# EAGLE board xiao-extension-grid (EAGLE 9.6.2)
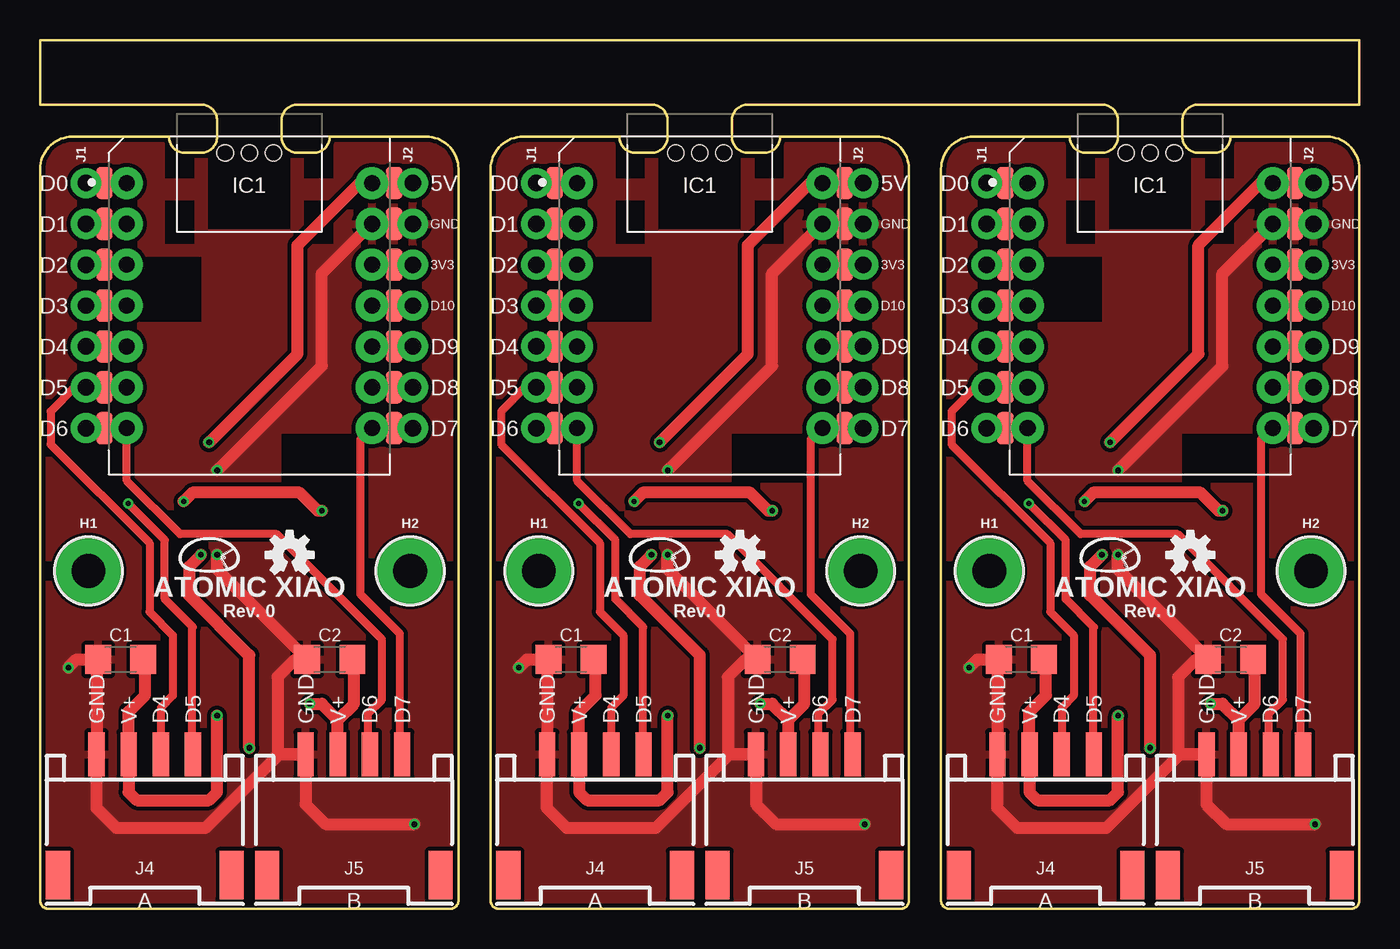
[diagram p0: board, top side]
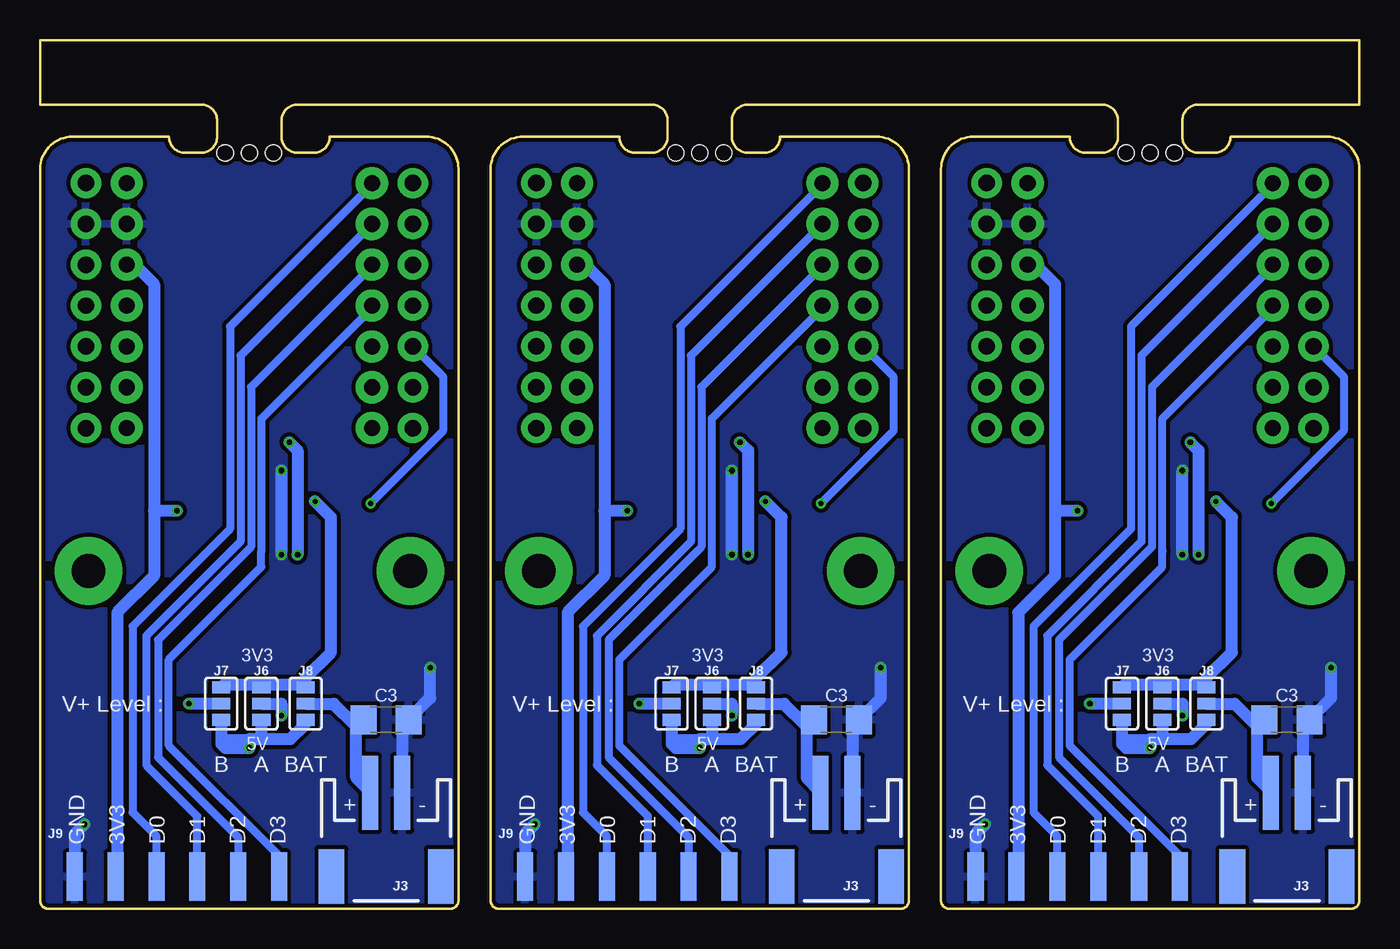
[diagram p1: board, bottom side, seen from below]

Size 82 x 54 mm. Coordinates in mm from the lower left corner, seen from the top.
Outline: 26,0.5 26,46 arc90 24,48 18,48 arc-90 17,47 16,47 arc-90 15,48 15,49 arc-90 16,50 28,50 38,50 arc-90 39,49 39,48 arc-90 38,47 37,47 arc-90 36,48 30,48 arc90 28,46 28,0.5 arc90 28.5,0 53.5,0 arc90 54,0.5 54,46 arc90 52,48 46,48 arc-90 45,47 44,47 arc-90 43,48 43,49 arc-90 44,50 56,50 66,50 arc-90 67,49 67,48 arc-90 66,47 65,47 arc-90 64,48 58,48 arc90 56,46 56,0.5 arc90 56.5,0 81.5,0 arc90 82,0.5 82,46 arc90 80,48 74,48 arc-90 73,47 72,47 arc-90 71,48 71,49 arc-90 72,50 82,50 82,54 56,54 28,54 0,54 0,50 10,50 arc-90 11,49 11,48 arc-90 10,47 9,47 arc-90 8,48 2,48 arc90 0,46 0,0.5 arc90 0.5,0 25.5,0 arc90 26,0.5
Copper layers (1*16): Top 0.035mm / dielectric 1.5mm / Bottom 0.035mm
Design rules "ssci_SeeedStudio_2layer_DRU_no_angle *": minimum track width 0.5mm, minimum drill 12mil, track to track 6mil, track to pad 6mil, pad to pad 6mil, via to via 6mil, smd to smd 0mil, copper to edge 10mil, drill to drill 10mil, minimum pad ring 10mil, minimum via ring 6mil, stop-mask expansion 2mil, vias tented up to drill 25mil, thermal gap 10mil
Net classes: 0 default: width 0.5 mm; 1 pwr: width 0.75 mm, clearance 0.25 mm
Holes 1 mm at 11.5,47 13,47 14.5,47 39.5,47 41,47 42.5,47 67.5,47 69,47 70.5,47

## Footprints (pad centres in the part's own frame; a part is rotated, then mirrored left to right if it is on the bottom)
C3216 = smd 1.6 x 1.8: 1 -1.4,0; 2 1.4,0
MOUNTING_HOLE_2.1 = drill 2.1 pad 4.2: H$1 0,0
XIAO-NRF52840-DIP = drill 1 pad 2: 3V3 7.62,-7.96; 5V 7.62,-2.88; D0 -7.62,-2.88; D1 -7.62,-5.42; D2 -7.62,-7.96; D3 -7.62,-10.5; D4 -7.62,-13.04; D5 -7.62,-15.58; D6 -7.62,-18.12; D7 7.62,-18.12; D8 7.62,-15.58; D9 7.62,-13.04; D10 7.62,-10.5; GND 7.62,-5.42
XIAO-NRF52840-SMD-PROTO = smd 1 x 2: 3V3 9,-7.96; 5V 9,-2.88; D0 -9,-2.88; D1 -9,-5.42; D2 -9,-7.96; D3 -9,-10.5; D4 -9,-13.04; D5 -9,-15.58; D6 -9,-18.12; D7 9,-18.12; D8 9,-15.58; D9 9,-13.04; D10 9,-10.5; GND 9,-5.42
1X07_NO_SILK = drill 1.016 pad 1.88: 1 0,0; 2 2.54,0; 3 5.08,0; 4 7.62,0; 5 10.16,0; 6 12.7,0; 7 15.24,0
JST-2-SMD = smd 1 x 4.6: 1 -1,-3.7; 2 1,-3.7 | smd 1.6 x 3.4: NC1 -3.4,1.5; NC2 3.4,1.5
HW4-SMD-2.0-90D = smd 1.01 x 2.74: 0 -1,-0.1; 1 -3,-0.1; GND 3,-0.1; V+ 1,-0.1 | smd 1.5 x 3: SS1 -5.4,7.4; SS2 5.4,7.4
SMT-JUMPER_3_1-NC_PASTE_SILK = smd 0.75 x 1.2: 1 -1,0; 2 0,0; 3 1,0
1X06-SMD_RA_MALE = smd 1 x 3: 1 -6.35,5; 2 -3.81,5; 3 -1.27,5; 4 1.27,5; 5 3.81,5; 6 6.35,5

## Placement (x,y rotation side)
C1  100u  [C3216]  5,15.5 180 top
C2  100u  [C3216]  18,15.5 180 top
C3  100u  [C3216]  4.5,11.75 0 bottom
C4  100u  [C3216]  33,15.5 180 top
C5  100u  [C3216]  46,15.5 180 top
C6  100u  [C3216]  32.5,11.75 0 bottom
C7  100u  [C3216]  61,15.5 180 top
C8  100u  [C3216]  74,15.5 180 top
C9  100u  [C3216]  60.5,11.75 0 bottom
H1  HOLE-2.1  [MOUNTING_HOLE_2.1]  3,21 0 top
H2  HOLE-2.1  [MOUNTING_HOLE_2.1]  23,21 0 top
H3  HOLE-2.1  [MOUNTING_HOLE_2.1]  31,21 0 top
H4  HOLE-2.1  [MOUNTING_HOLE_2.1]  51,21 0 top
H5  HOLE-2.1  [MOUNTING_HOLE_2.1]  59,21 0 top
H6  HOLE-2.1  [MOUNTING_HOLE_2.1]  79,21 0 top
IC1  SEEED-STUDIO-XIAO-NRF52840-DIP  [XIAO-NRF52840-DIP]  13,48 0 top
IC2  SEEED-STUDIO-XIAO-NRF52840-PROTO  [XIAO-NRF52840-SMD-PROTO]  13,48 0 top
IC3  SEEED-STUDIO-XIAO-NRF52840-DIP  [XIAO-NRF52840-DIP]  41,48 0 top
IC4  SEEED-STUDIO-XIAO-NRF52840-PROTO  [XIAO-NRF52840-SMD-PROTO]  41,48 0 top
IC5  SEEED-STUDIO-XIAO-NRF52840-DIP  [XIAO-NRF52840-DIP]  69,48 0 top
IC6  SEEED-STUDIO-XIAO-NRF52840-PROTO  [XIAO-NRF52840-SMD-PROTO]  69,48 0 top
J1  [1X07_NO_SILK]  2.84,45.12 270 top
J2  [1X07_NO_SILK]  23.16,45.12 270 top
J3  [JST-2-SMD]  4.5,3.5 180 bottom
J4  GROVE-CONNECTOR-SMD90D  [HW4-SMD-2.0-90D]  6.5,9.5 180 top
J5  GROVE-CONNECTOR-SMD90D  [HW4-SMD-2.0-90D]  19.5,9.5 180 top
J6  JUMPER-SMT_3_1-NC_PASTE-SILK  [SMT-JUMPER_3_1-NC_PASTE_SILK]  12.25,12.75 90 bottom
J7  JUMPER-SMT_3_1-NC_PASTE-SILK  [SMT-JUMPER_3_1-NC_PASTE_SILK]  14.75,12.75 90 bottom
J8  JUMPER-SMT_3_1-NC_PASTE-SILK  [SMT-JUMPER_3_1-NC_PASTE_SILK]  9.5,12.75 90 bottom
J9  RA 6Pin SMD  [1X06-SMD_RA_MALE]  17.5,-3 0 bottom
J10  [1X07_NO_SILK]  30.84,45.12 270 top
J11  [1X07_NO_SILK]  51.16,45.12 270 top
J12  [JST-2-SMD]  32.5,3.5 180 bottom
J13  JUMPER-SMT_3_1-NC_PASTE-SILK  [SMT-JUMPER_3_1-NC_PASTE_SILK]  40.25,12.75 90 bottom
J14  JUMPER-SMT_3_1-NC_PASTE-SILK  [SMT-JUMPER_3_1-NC_PASTE_SILK]  42.75,12.75 90 bottom
J15  GROVE-CONNECTOR-SMD90D  [HW4-SMD-2.0-90D]  47.5,9.5 180 top
J16  GROVE-CONNECTOR-SMD90D  [HW4-SMD-2.0-90D]  34.5,9.5 180 top
J17  JUMPER-SMT_3_1-NC_PASTE-SILK  [SMT-JUMPER_3_1-NC_PASTE_SILK]  37.5,12.75 90 bottom
J18  RA 6Pin SMD  [1X06-SMD_RA_MALE]  45.5,-3 0 bottom
J19  [1X07_NO_SILK]  58.84,45.12 270 top
J20  [1X07_NO_SILK]  79.16,45.12 270 top
J21  [JST-2-SMD]  60.5,3.5 180 bottom
J22  JUMPER-SMT_3_1-NC_PASTE-SILK  [SMT-JUMPER_3_1-NC_PASTE_SILK]  68.25,12.75 90 bottom
J23  JUMPER-SMT_3_1-NC_PASTE-SILK  [SMT-JUMPER_3_1-NC_PASTE_SILK]  70.75,12.75 90 bottom
J24  GROVE-CONNECTOR-SMD90D  [HW4-SMD-2.0-90D]  75.5,9.5 180 top
J25  GROVE-CONNECTOR-SMD90D  [HW4-SMD-2.0-90D]  62.5,9.5 180 top
J26  JUMPER-SMT_3_1-NC_PASTE-SILK  [SMT-JUMPER_3_1-NC_PASTE_SILK]  65.5,12.75 90 bottom
J27  RA 6Pin SMD  [1X06-SMD_RA_MALE]  73.5,-3 0 bottom
LOGO1  LOGO  [LOGO]  10.5,22 0 top
LOGO2  OSHW-LOGOS  [OSHW-LOGO-S]  15.5,22 0 top
LOGO3  LOGO  [LOGO]  38.5,22 0 top
LOGO4  OSHW-LOGOS  [OSHW-LOGO-S]  43.5,22 0 top
LOGO5  LOGO  [LOGO]  66.5,22 0 top
LOGO6  OSHW-LOGOS  [OSHW-LOGO-S]  71.5,22 0 top

## Library data of the parts
C1-C9 = rcl; SPICEPREFIX: C
H1-H6 = Botamochi-Hole
IC1-IC6 = Seeed Studio XIAO
J1 J2 J10 J11 J19 J20 = SparkFun-Connectors
J3 J12 J21 = SparkFun-Connectors; PROD_ID: CONN-11443
J4 J5 J15 J16 J24 J25 = SEEED-GROVE-CONNECTOR
J6-J8 J13 J14 J17 J22 J23 J26 = Botamochi-Jumper
J9 J18 J27 = ProtoBoard
LOGO1 LOGO3 LOGO5 = botamochi-symbol
LOGO2 LOGO4 LOGO6 = SparkFun-Aesthetics

## Nets
+3V1 [pwr]: IC3.3V3 IC4.3V3 J11.3 J13.3 J14.3 J17.3 J18.2
+3V2 [pwr]: IC5.3V3 IC6.3V3 J20.3 J22.3 J23.3 J26.3 J27.2
+3V3 [pwr]: IC1.3V3 IC2.3V3 J2.3 J6.3 J7.3 J8.3 J9.2
+5V [pwr]: IC1.5V IC2.5V J2.1 J6.1 J7.1 J8.1
+5V1 [pwr]: IC3.5V IC4.5V J11.1 J13.1 J14.1 J17.1
+5V2 [pwr]: IC5.5V IC6.5V J20.1 J22.1 J23.1 J26.1
D0: IC1.D0 IC2.D0 J1.1 J9.3
D1: IC1.D1 IC2.D1 J1.2 J9.4
D2: IC1.D2 IC2.D2 J1.3 J9.5
D3: IC1.D3 IC2.D3 J1.4 J9.6
D4: IC3.D0 IC4.D0 J10.1 J18.3
D5: IC3.D1 IC4.D1 J10.2 J18.4
D6: IC3.D2 IC4.D2 J10.3 J18.5
D7: IC3.D3 IC4.D3 J10.4 J18.6
D8: IC1.D9 IC2.D9 J2.5
D9: IC1.D8 IC2.D8 J2.6
D10: IC1.D10 IC2.D10 J2.4
D11: IC3.D10 IC4.D10 J11.4
D12: IC3.D9 IC4.D9 J11.5
D13: IC3.D8 IC4.D8 J11.6
D14: IC5.D0 IC6.D0 J19.1 J27.3
D15: IC5.D1 IC6.D1 J19.2 J27.4
D16: IC5.D2 IC6.D2 J19.3 J27.5
D17: IC5.D3 IC6.D3 J19.4 J27.6
D18: IC5.D10 IC6.D10 J20.4
D19: IC5.D9 IC6.D9 J20.5
D20: IC5.D8 IC6.D8 J20.6
GND [pwr]: C1.2 C2.2 C3.2 IC1.GND IC2.GND J2.2 J3.1 J4.GND J5.GND J9.1
GND1 [pwr]: C4.2 C5.2 C6.2 IC3.GND IC4.GND J11.2 J12.1 J15.GND J16.GND J18.1
GND2 [pwr]: C7.2 C8.2 C9.2 IC5.GND IC6.GND J20.2 J21.1 J24.GND J25.GND J27.1
N$1: C1.1 J4.V+ J6.2
N$2: C2.1 J5.V+ J7.2
N$3: C3.1 J3.2 J8.2
N$4: C4.1 J13.2 J16.V+
N$5: C5.1 J14.2 J15.V+
N$6: C6.1 J12.2 J17.2
N$7: C7.1 J22.2 J25.V+
N$8: C8.1 J23.2 J24.V+
N$9: C9.1 J21.2 J26.2
RX: IC1.D7 IC2.D7 J2.7 J5.1
RX1: IC3.D7 IC4.D7 J11.7 J15.1
RX2: IC5.D7 IC6.D7 J20.7 J24.1
SCL: IC1.D5 IC2.D5 J1.6 J4.0
SCL1: IC3.D5 IC4.D5 J10.6 J16.0
SCL2: IC5.D5 IC6.D5 J19.6 J25.0
SDA: IC1.D4 IC2.D4 J1.5 J4.1
SDA1: IC3.D4 IC4.D4 J10.5 J16.1
SDA2: IC5.D4 IC6.D4 J19.5 J25.1
TX: IC1.D6 IC2.D6 J1.7 J5.0
TX1: IC3.D6 IC4.D6 J10.7 J15.0
TX2: IC5.D6 IC6.D6 J19.7 J24.0

## Tracks (layer width: path | path; a pad name or v marks a point on that pad's centre or on a via)
+3V1  (via drill 0.3, 0.35)
  Top 0.75: J11.3 51,40.12 50.02,40.12 IC4.3V3 49.69,40.12 48.88,40.12 IC3.3V3 48.55,39.96 | v36.92,25.33 37.47,25.88 44.12,25.88 45.25,24.75 v45.5,24.75
  Bottom 0.75: J14.3 42.55,13.95 40.45,13.95 J13.3 40.05,13.95 37.7,13.95 J17.3 37.5,14.37 35.92,15.95 35.92,24.33 v36.92,25.33 | 46.92,24.75 46.92,38.83 48.13,40.04 IC3.3V3 | 46.92,24.75 46.92,20.7 49.2,18.42 49.2,2.12 J18.2 | 46.92,24.75 v45.5,24.75
+3V2  (via drill 0.3, 0.35)
  Top 0.75: J20.3 79,40.12 78.02,40.12 IC6.3V3 77.69,40.12 76.88,40.12 IC5.3V3 76.55,39.96 | v64.92,25.33 65.47,25.88 72.12,25.88 73.25,24.75 v73.5,24.75
  Bottom 0.75: J23.3 70.55,13.95 68.45,13.95 J22.3 68.05,13.95 65.7,13.95 J26.3 65.5,14.37 63.92,15.95 63.92,24.33 v64.92,25.33 | 74.92,24.75 74.92,38.83 76.13,40.04 IC5.3V3 | 74.92,24.75 74.92,20.7 77.2,18.42 77.2,2.12 J27.2 | 74.92,24.75 v73.5,24.75
+3V3  (via drill 0.3, 0.35)
  Top 0.75: J2.3 23,40.12 22.02,40.12 IC2.3V3 21.69,40.12 20.88,40.12 IC1.3V3 20.55,39.96 | v8.92,25.33 9.47,25.88 16.12,25.88 17.25,24.75 v17.5,24.75
  Bottom 0.75: J7.3 14.55,13.95 12.45,13.95 J6.3 12.05,13.95 9.7,13.95 J8.3 9.5,14.37 7.92,15.95 7.92,24.33 v8.92,25.33 | 18.92,24.75 18.92,38.83 20.13,40.04 IC1.3V3 | 18.92,24.75 18.92,20.7 21.2,18.42 21.2,2.12 J9.2 | 18.92,24.75 v17.5,24.75
+5V  (via drill 0.35)
  Top 0.75: J2.1 23,45.18 22.02,45.18 IC2.5V 21.69,45.18 20.71,45.18 IC1.5V 19.86,45.12 15.99,41.25 15.99,34.49 v10.5,29 | v13,10 13,15.75 9.25,19.5 9.25,21.25 v10,22
  Bottom 0.75: J6.1 12.25,10.55 | 12.25,10.55 13,10.55 13,10.5 14.75,10.5 J7.1 14.75,10.25 14.5,10 v13,10 | 12.25,10.55 10.45,10.55 9.5,11.5 J8.1 | v10.5,29 10,28.5 v10,22
+5V1  (via drill 0.35)
  Top 0.75: J11.1 51,45.18 50.02,45.18 IC4.5V 49.69,45.18 48.71,45.18 IC3.5V 47.86,45.12 43.99,41.25 43.99,34.49 v38.5,29 | v41,10 41,15.75 37.25,19.5 37.25,21.25 v38,22
  Bottom 0.75: J13.1 40.25,10.55 | 40.25,10.55 41,10.55 41,10.5 42.75,10.5 J14.1 42.75,10.25 42.5,10 v41,10 | 40.25,10.55 38.45,10.55 37.5,11.5 J17.1 | v38.5,29 38,28.5 v38,22
+5V2  (via drill 0.35)
  Top 0.75: J20.1 79,45.18 78.02,45.18 IC6.5V 77.69,45.18 76.71,45.18 IC5.5V 75.86,45.12 72,41.25 72,34.49 v66.5,29 | v69,10 69,15.75 65.25,19.5 65.25,21.25 v66,22
  Bottom 0.75: J22.1 68.25,10.55 | 68.25,10.55 69,10.55 69,10.5 70.75,10.5 J23.1 70.75,10.25 70.5,10 v69,10 | 68.25,10.55 66.45,10.55 65.5,11.5 J26.1 | v66.5,29 66,28.5 v66,22
D0
  Top 0.5: J1.1 2.94,45.18 3.91,45.18 IC2.D0 4.24,45.18 5.22,45.18 IC1.D0
  Bottom 0.5: J9.3 18.77,4.5 20.26,5.99 20.26,17.56 14.2,23.62 14.2,36.2 5.38,45.02 IC1.D0
D1
  Top 0.5: J1.2 2.94,42.73 3.91,42.73 IC2.D1 4.24,42.57 5.22,42.57 IC1.D1
  Bottom 0.5: J9.4 16.23,5.75 19.4,8.92 19.4,16.97 13.55,22.82 13.55,34.4 IC1.D1
D2
  Top 0.5: J1.3 2.94,40.12 3.91,40.12 IC2.D2 4.24,40.12 5.22,40.12 IC1.D2
  Bottom 0.5: J9.5 13.7,2.12 13.7,4.45 18.67,9.42 18.67,16.72 12.9,22.5 12.9,32.45 5.38,39.96 IC1.D2
D3
  Top 0.5: J1.4 2.94,37.51 3.91,37.51 IC2.D3 4.24,37.51 5.22,37.51 IC1.D3
  Bottom 0.5: J9.6 11,2.31 11,3.13 18,10.13 18,15.5 12.25,21.25 12.25,22.22 12.24,22.23 12.24,30.49 5.38,37.35 IC1.D3
D4
  Top 0.5: J10.1 30.94,45.18 31.91,45.18 IC4.D0 32.24,45.18 33.22,45.18 IC3.D0
  Bottom 0.5: J18.3 46.77,4.5 48.26,5.99 48.26,17.56 42.2,23.62 42.2,36.2 33.38,45.02 IC3.D0
D5
  Top 0.5: J10.2 30.94,42.73 31.91,42.73 IC4.D1 32.24,42.57 33.22,42.57 IC3.D1
  Bottom 0.5: J18.4 44.23,5.75 47.4,8.92 47.4,16.97 41.55,22.82 41.55,34.4 IC3.D1
D6
  Top 0.5: J10.3 30.94,40.12 31.91,40.12 IC4.D2 32.24,40.12 33.22,40.12 IC3.D2
  Bottom 0.5: J18.5 41.7,2.12 41.7,4.45 46.67,9.42 46.67,16.72 40.9,22.5 40.9,32.45 33.38,39.96 IC3.D2
D7
  Top 0.5: J10.4 30.94,37.51 31.91,37.51 IC4.D3 32.24,37.51 33.22,37.51 IC3.D3
  Bottom 0.5: J18.6 39,2.31 39,3.13 46,10.13 46,15.5 40.25,21.25 40.25,22.22 40.24,22.23 40.24,30.49 33.38,37.35 IC3.D3
D8
  Top 0.5: J2.5 23,35.07 22.02,35.07 IC2.D9 21.86,35.07 20.71,35.07 IC1.D9
D9
  Top 0.5: J2.6 23,32.46 22.02,32.46 IC2.D8 21.86,32.46 20.71,32.46 IC1.D8
D10
  Top 0.5: J2.4 23,37.51 22.02,37.51 IC2.D10 21.86,37.51 20.71,37.51 IC1.D10
D11
  Top 0.5: J11.4 51,37.51 50.02,37.51 IC4.D10 49.85,37.51 48.71,37.51 IC3.D10
D12
  Top 0.5: J11.5 51,35.07 50.02,35.07 IC4.D9 49.85,35.07 48.71,35.07 IC3.D9
D13
  Top 0.5: J11.6 51,32.46 50.02,32.46 IC4.D8 49.85,32.46 48.71,32.46 IC3.D8
D14
  Top 0.5: J19.1 58.94,45.18 59.91,45.18 IC6.D0 60.24,45.18 61.22,45.18 IC5.D0
  Bottom 0.5: J27.3 74.77,4.5 76.26,5.99 76.26,17.56 70.2,23.62 70.2,36.2 61.38,45.02 IC5.D0
D15
  Top 0.5: J19.2 58.94,42.73 59.91,42.73 IC6.D1 60.24,42.57 61.22,42.57 IC5.D1
  Bottom 0.5: J27.4 72.23,5.75 75.4,8.92 75.4,16.97 69.55,22.82 69.55,34.4 IC5.D1
D16
  Top 0.5: J19.3 58.94,40.12 59.91,40.12 IC6.D2 60.24,40.12 61.22,40.12 IC5.D2
  Bottom 0.5: J27.5 69.7,2.12 69.7,4.45 74.67,9.42 74.67,16.72 68.9,22.5 68.9,32.45 61.38,39.96 IC5.D2
D17
  Top 0.5: J19.4 58.94,37.51 59.91,37.51 IC6.D3 60.24,37.51 61.22,37.51 IC5.D3
  Bottom 0.5: J27.6 67,2.31 67,3.13 74,10.13 74,15.5 68.25,21.25 68.25,22.22 68.24,22.23 68.24,30.49 61.38,37.35 IC5.D3
D18
  Top 0.5: J20.4 79,37.51 78.02,37.51 IC6.D10 77.86,37.51 76.71,37.51 IC5.D10
D19
  Top 0.5: J20.5 79,35.07 78.02,35.07 IC6.D9 77.86,35.07 76.71,35.07 IC5.D9
D20
  Top 0.5: J20.6 79,32.46 78.02,32.46 IC6.D8 77.86,32.46 76.71,32.46 IC5.D8
GND  (via drill 0.35)
  Top 0.75: v23.25,5.25 17.75,5.25 16.5,6.5 J5.GND | v1.75,15 2.25,15.5 C1.2 3.5,15.4 J4.GND 3.5,6.25 4.75,5 10.25,5 14.85,9.6 J5.GND | J5.GND 14.75,9.6 14.75,14.4 15.85,15.5 C2.2 11,21.1 v11,22 | v11,27.25 17.5,33.75 17.5,39.5 20.58,42.58 IC1.GND IC2.GND J2.2
  Bottom 0.75: v23.25,5.25 23.85,4.65 J9.1 | J3.1 3.5,11.35 C3.2 1.75,13.1 v1.75,15 | v11,22 v11,27.25
  pour Top: 0,48 26,48 26,0 0,0
  pour Bottom: 0,48 26,48 26,0 0,0
GND1  (via drill 0.35)
  Top 0.75: v51.25,5.25 45.75,5.25 44.5,6.5 J15.GND | v29.75,15 30.25,15.5 C4.2 31.5,15.4 J16.GND 31.5,6.25 32.75,5 38.25,5 42.85,9.6 J15.GND | J15.GND 42.75,9.6 42.75,14.4 43.85,15.5 C5.2 39,21.1 v39,22 | v39,27.25 45.5,33.75 45.5,39.5 48.58,42.58 IC3.GND IC4.GND J11.2
  Bottom 0.75: v51.25,5.25 51.85,4.65 J18.1 | J12.1 31.5,11.35 C6.2 29.75,13.1 v29.75,15 | v39,22 v39,27.25
  pour Top: 28,48 54,48 54,0 28,0
  pour Bottom: 28,48 54,48 54,0 28,0
GND2  (via drill 0.35)
  Top 0.75: v79.25,5.25 73.75,5.25 72.5,6.5 J24.GND | v57.75,15 58.25,15.5 C7.2 59.5,15.4 J25.GND 59.5,6.25 60.75,5 66.25,5 70.85,9.6 J24.GND | J24.GND 70.75,9.6 70.75,14.4 71.85,15.5 C8.2 67,21.1 v67,22 | v67,27.25 73.5,33.75 73.5,39.5 76.58,42.58 IC5.GND IC6.GND J20.2
  Bottom 0.75: v79.25,5.25 79.85,4.65 J27.1 | J21.1 59.5,11.35 C9.2 57.75,13.1 v57.75,15 | v67,22 v67,27.25
  pour Top: 56,48 82,48 82,0 56,0
  pour Bottom: 56,48 82,48 82,0 56,0
N$1  (via drill 0.35)
  Top 0.5: 5.54,8.97 5.54,9.46 J4.V+ | 6.52,15.49 C1.1
  Top 0.75: 6.52,15.49 6.52,13.27 5.5,12.25 J4.V+ 5.5,7.25 6,6.75 10.5,6.75 11,7.25 v11,12
  Bottom 0.75: v11,12 11,12.75 J6.2
N$2  (via drill 0.35)
  Top 0.5: 18.59,8.97 18.59,9.46 J5.V+ | C2.1 19.5,15.4
  Top 0.75: 18.5,11.75 19.5,12.75 19.5,15.4 | J5.V+ 18.5,11.75 | v16.75,12.75 17.5,12.75 18.5,11.75
  Bottom 0.75: J7.2 v16.75,12.75
N$3
  Bottom 0.5: C3.1 5.95,11.75 6.42,11.42 6.35,11.35 | 5.54,7.34 J3.2
  Bottom 0.75: 6.35,11.35 6.35,8.14 5.54,7.34 | J8.2 7.75,12.75 6.42,11.42
N$4  (via drill 0.35)
  Top 0.5: 33.55,8.97 33.55,9.46 J16.V+ | 34.52,15.49 C4.1
  Top 0.75: 34.52,15.49 34.52,13.27 33.5,12.25 J16.V+ 33.5,7.25 34,6.75 38.5,6.75 39,7.25 v39,12
  Bottom 0.75: v39,12 39,12.75 J13.2
N$5  (via drill 0.35)
  Top 0.5: 46.59,8.97 46.59,9.46 J15.V+ | C5.1 47.5,15.4
  Top 0.75: 46.5,11.75 47.5,12.75 47.5,15.4 | J15.V+ 46.5,11.75 | v44.75,12.75 45.5,12.75 46.5,11.75
  Bottom 0.75: J14.2 v44.75,12.75
N$6
  Bottom 0.5: C6.1 33.95,11.75 34.42,11.42 34.35,11.35 | 33.55,7.34 J12.2
  Bottom 0.75: 34.35,11.35 34.35,8.14 33.55,7.34 | J17.2 35.75,12.75 34.42,11.42
N$7  (via drill 0.35)
  Top 0.5: 61.55,8.97 61.55,9.46 J25.V+ | 62.52,15.49 C7.1
  Top 0.75: 62.52,15.49 62.52,13.27 61.5,12.25 J25.V+ 61.5,7.25 62,6.75 66.5,6.75 67,7.25 v67,12
  Bottom 0.75: v67,12 67,12.75 J22.2
N$8  (via drill 0.35)
  Top 0.5: 74.59,8.97 74.59,9.46 J24.V+ | C8.1 75.5,15.4
  Top 0.75: 74.5,11.75 75.5,12.75 75.5,15.4 | J24.V+ 74.5,11.75 | v72.75,12.75 73.5,12.75 74.5,11.75
  Bottom 0.75: J23.2 v72.75,12.75
N$9
  Bottom 0.5: C9.1 61.95,11.75 62.42,11.42 62.35,11.35 | 61.55,7.34 J21.2
  Bottom 0.75: 62.35,11.35 62.35,8.14 61.55,7.34 | J26.2 63.75,12.75 62.42,11.42
RX
  Top 0.5: J2.7 23,30.01 22.02,30.01 IC2.D7 21.86,30.01 20.71,30.01 IC1.D7 20.55,29.85 19.89,29.18 19.89,19.56 22.34,17.1 22.34,9.62 J5.1
RX1
  Top 0.5: J11.7 51,30.01 50.02,30.01 IC4.D7 49.85,30.01 48.71,30.01 IC3.D7 48.55,29.85 47.89,29.18 47.89,19.56 50.34,17.1 50.34,9.62 J15.1
RX2
  Top 0.5: J20.7 79,30.01 78.02,30.01 IC6.D7 77.86,30.01 76.71,30.01 IC5.D7 76.55,29.85 75.89,29.18 75.89,19.56 78.34,17.1 78.34,9.62 J24.1
SCL
  Top 0.5: 7.34,9.62 J4.0 7.5,12.5 8.25,13.25 8.25,17 6.79,18.45 6.79,22.73 0.65,28.87 0.65,30.92 2.15,32.42 J1.6 2.94,32.46 3.91,32.46 IC2.D5 4.24,32.46 5.22,32.46 IC1.D5
SCL1
  Top 0.5: 35.34,9.62 J16.0 35.5,12.5 36.25,13.25 36.25,17 34.8,18.45 34.8,22.73 28.65,28.87 28.65,30.92 30.15,32.42 J10.6 30.94,32.46 31.91,32.46 IC4.D5 32.24,32.46 33.22,32.46 IC3.D5
SCL2
  Top 0.5: 63.34,9.62 J25.0 63.5,12.5 64.25,13.25 64.25,17 62.8,18.45 62.8,22.73 56.65,28.87 56.65,30.92 58.15,32.42 J19.6 58.94,32.46 59.91,32.46 IC6.D5 60.24,32.46 61.22,32.46 IC5.D5
SDA  (via drill 0.3)
  Top 0.5: J1.5 2.94,35.07 3.91,35.07 IC2.D4 4.24,34.9 5.22,34.9 IC1.D4 | v5.47,25.2 7.75,22.91 7.75,19.25 9.5,17.5 9.46,17.46 9.46,9.62 J4.1
  Bottom 0.5: v5.47,25.2 0.97,29.7 0.97,33.1 2.77,34.9 J1.5
SDA1  (via drill 0.3)
  Top 0.5: J10.5 30.94,35.07 31.91,35.07 IC4.D4 32.24,34.9 33.22,34.9 IC3.D4 | v33.47,25.2 35.75,22.91 35.75,19.25 37.5,17.5 37.46,17.46 37.46,9.62 J16.1
  Bottom 0.5: v33.47,25.2 28.97,29.7 28.97,33.1 30.77,34.9 J10.5
SDA2  (via drill 0.3)
  Top 0.5: J19.5 58.94,35.07 59.91,35.07 IC6.D4 60.24,34.9 61.22,34.9 IC5.D4 | v61.47,25.2 63.75,22.91 63.75,19.25 65.5,17.5 65.46,17.46 65.46,9.62 J25.1
  Bottom 0.5: v61.47,25.2 56.97,29.7 56.97,33.1 58.77,34.9 J19.5
TX
  Top 0.5: J1.7 2.94,30.01 3.91,30.01 IC2.D6 4.24,29.85 5.22,29.85 IC1.D6 5.38,26.6 8.69,23.29 14.71,23.29 21.25,16.75 21.25,13 20.39,12.14 20.39,9.62 J5.0
TX1
  Top 0.5: J10.7 30.94,30.01 31.91,30.01 IC4.D6 32.24,29.85 33.22,29.85 IC3.D6 33.38,26.6 36.69,23.29 42.71,23.29 49.25,16.75 49.25,13 48.39,12.14 48.39,9.62 J15.0
TX2
  Top 0.5: J19.7 58.94,30.01 59.91,30.01 IC6.D6 60.24,29.85 61.22,29.85 IC5.D6 61.38,26.6 64.69,23.29 70.71,23.29 77.25,16.75 77.25,13 76.39,12.14 76.39,9.62 J24.0

## Text on the board
tNames: D0 | 5V | D0 | 5V | D0 | 5V | D1 | GND | D1 | GND | D1 | GND | D2 | 3V3 | D2 | 3V3 | D2 | 3V3 | D3 | D10 | D3 | D10 | D3 | D10 | D4 | D9 | D4 | D9 | D4 | D9 | D5 | D8 | D5 | D8 | D5 | D8 | D6 | D7 | D6 | D7 | D6 | D7 | ATOMIC XIAO | ATOMIC XIAO | ATOMIC XIAO | Rev. 0 | Rev. 0 | Rev. 0 | GND | V+ | D4 | D5 | GND | V+ | D6 | D7 | GND | V+ | D4 | D5 | GND | V+ | D6 | D7 | GND | V+ | D4 | D5 | GND | V+ | D6 | D7 | A | B | A | B | A | B
bNames: 3V3 | 3V3 | 3V3 | V+ Level : | V+ Level : | V+ Level : | 5V | 5V | 5V | BAT | A | B | BAT | A | B | BAT | A | B | - | + | - | + | - | + | D3 | D2 | D1 | D0 | 3V3 | GND | D3 | D2 | D1 | D0 | 3V3 | GND | D3 | D2 | D1 | D0 | 3V3 | GND
_tNames: J1 | J2 | J1 | J2 | J1 | J2 | IC1 | IC1 | IC1 | H1 | H2 | H1 | H2 | H1 | H2 | C1 | C2 | C1 | C2 | C1 | C2 | J4 | J5 | J4 | J5 | J4 | J5
_bNames: J8 | J6 | J7 | J8 | J6 | J7 | J8 | J6 | J7 | C3 | C3 | C3 | J9 | J9 | J9 | J3 | J3 | J3